# EAGLE board GBduino4 (EAGLE 7.6.0)
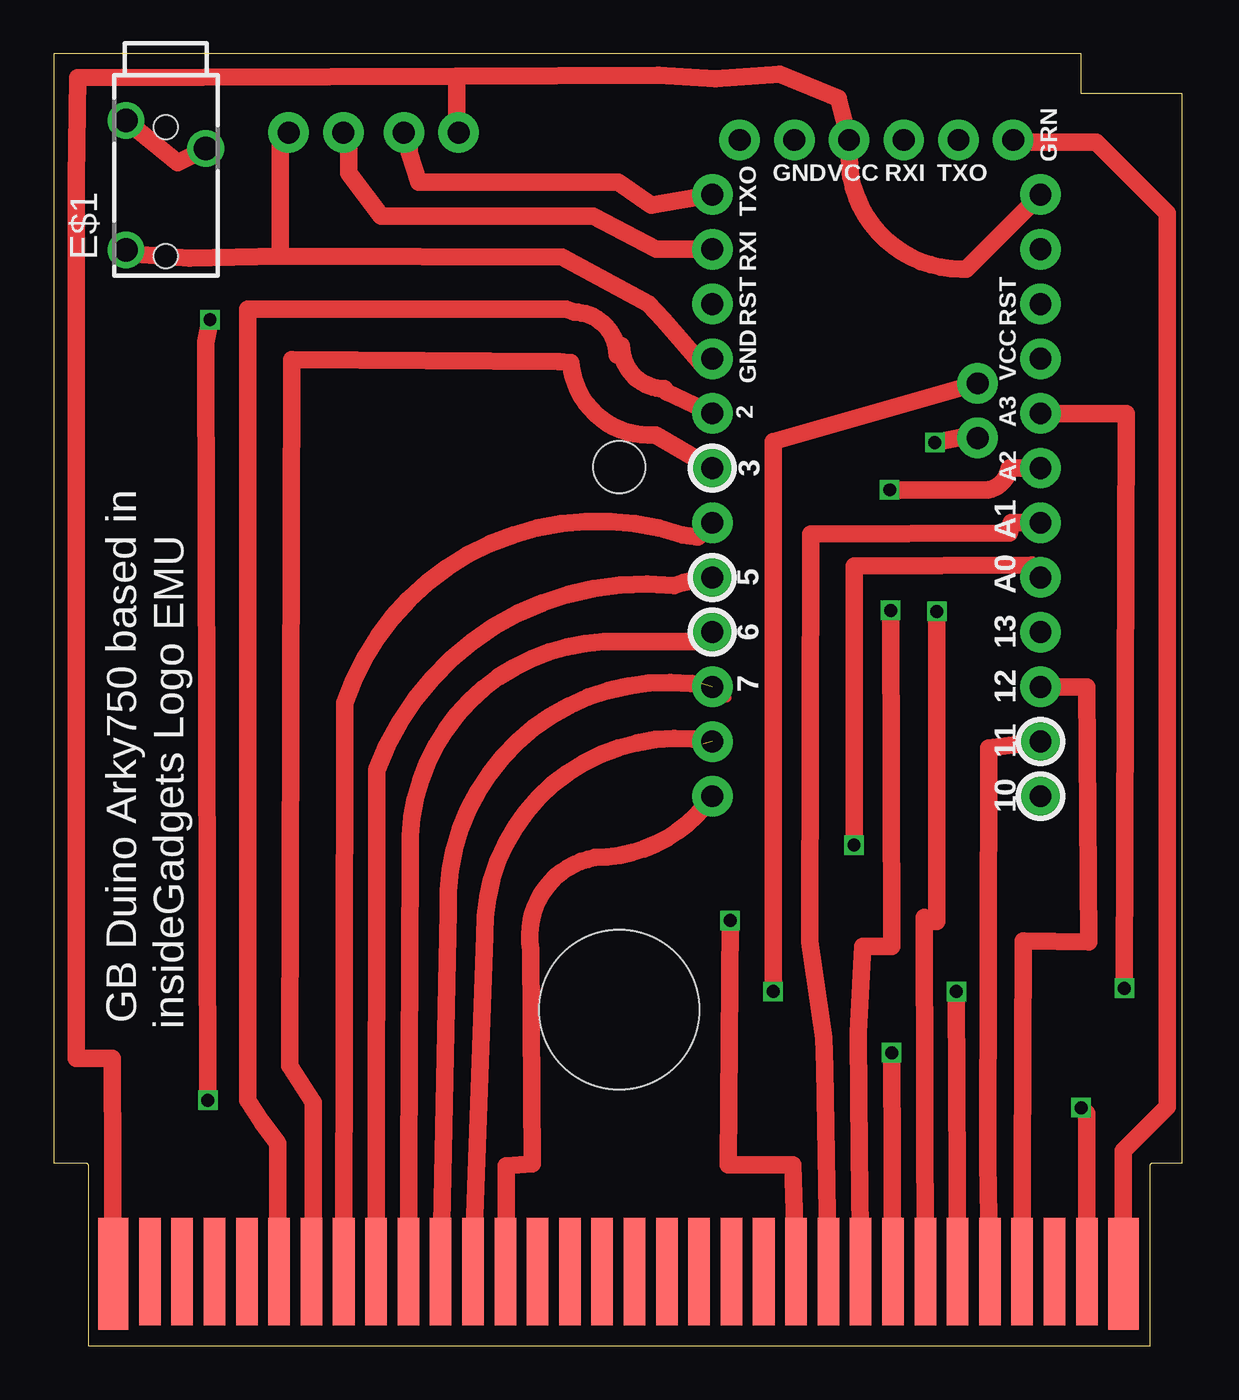
[diagram p0: board, top side]
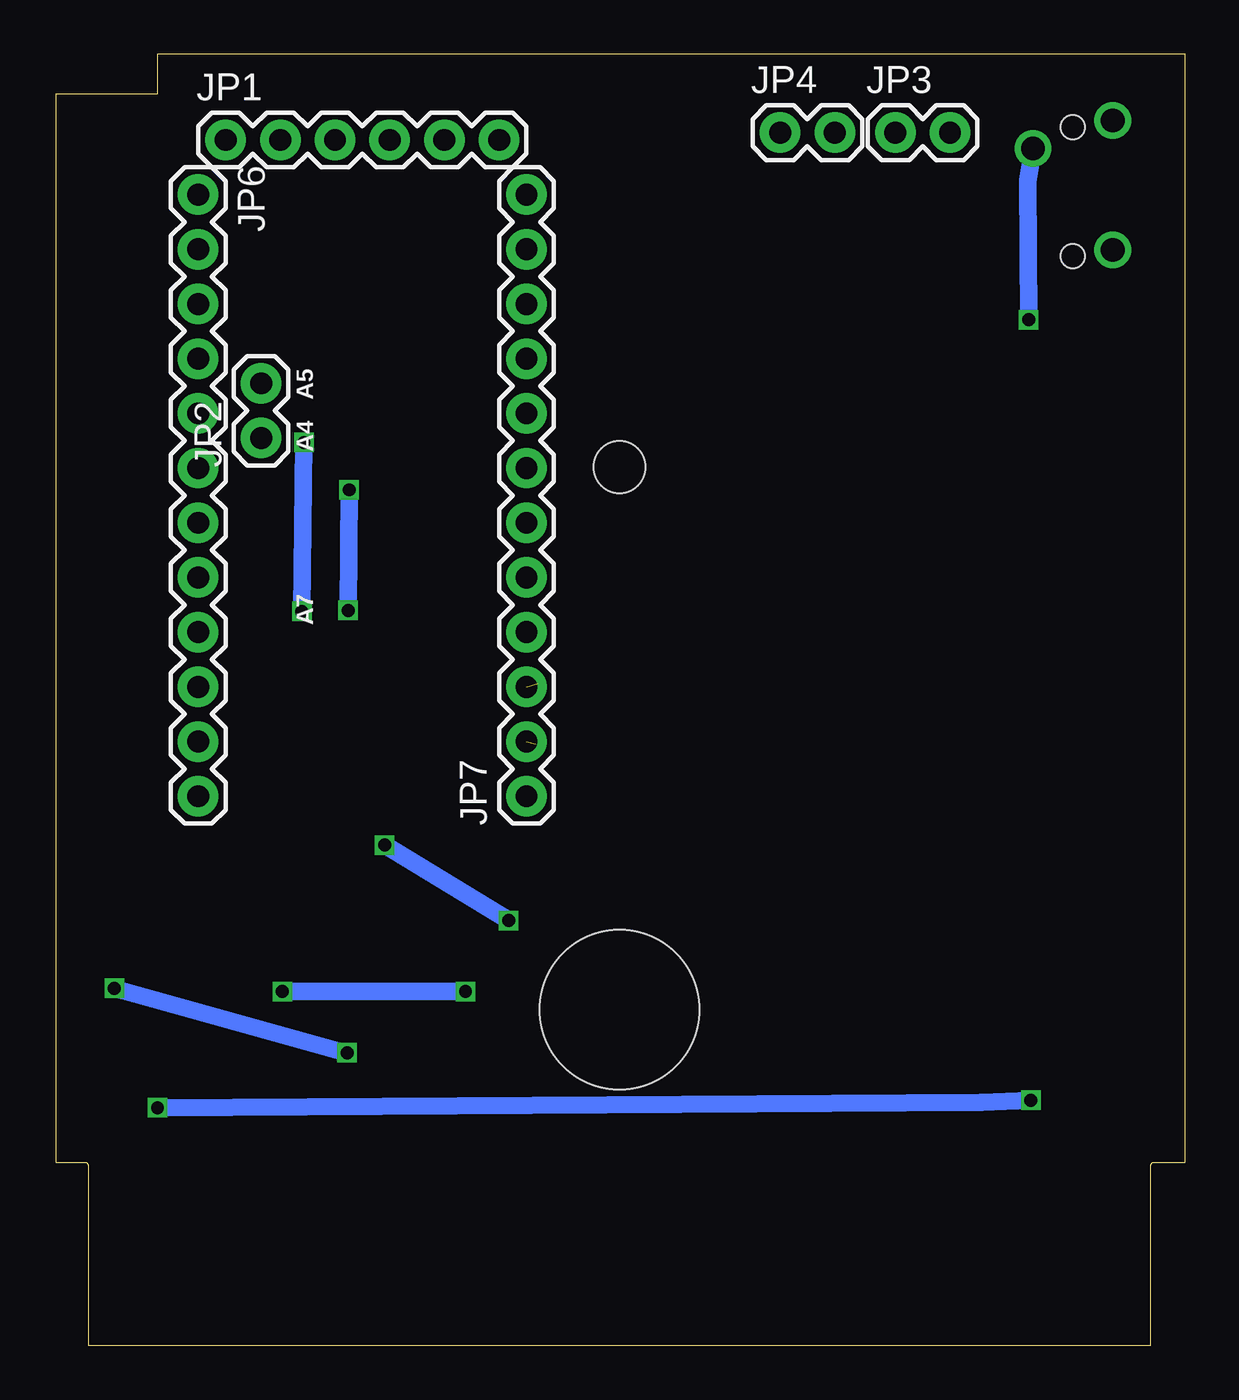
[diagram p1: board, bottom side, seen from below]

Size 52.4 x 60 mm. Coordinates in mm from the lower left corner, seen from the top.
Outline: 52.4,58.15 47.7,58.15 47.7,60 0,60 0,8.5 1.46,8.5 arc-90 1.6,8.36 1.6,0 50.9,0 50.9,8.36 arc-90 51.04,8.5 52.4,8.5 52.4,58.15
Copper layers (1*16): Top 0.035mm / dielectric 1.5mm / Bottom 0.035mm
Design rules "ITEADstudio_DRC": minimum track width 6mil, minimum drill 12mil, track to track 6mil, track to pad 6mil, pad to pad 6mil, via to via 6mil, smd to smd 0mil, copper to edge 10mil, drill to drill 10mil, minimum pad ring 10mil, minimum via ring 6mil, stop-mask expansion 2mil, vias tented up to drill 100mil, thermal gap 10mil
Net classes: 0 default: width 0.203 mm; 1 vcc: width 0.254 mm
Holes 7.4 mm at 26.25,15.6
Holes 2.4 mm at 26.25,40.8

## Footprints (pad centres in the part's own frame; a part is rotated, then mirrored left to right if it is on the bottom)
1501_03 = drill 1.1 pad 1.7: 1 -1.85,0.3; 2 1.85,-1; 3 -1.85,-5.7 | hole 1.1: 0,0; 0,-6
1X06 = drill 1.016 pad 1.88: 1 0,0; 2 2.54,0; 3 5.08,0; 4 7.62,0; 5 10.16,0; 6 12.7,0
1X02 = drill 1.016 pad 1.88: 1 0,0; 2 2.54,0
1X12 = drill 1.016 pad 1.88: 1 0,0; 2 2.54,0; 3 5.08,0; 4 7.62,0; 5 10.16,0; 6 12.7,0; 7 15.24,0; 8 17.78,0; 9 20.32,0; 10 22.86,0; 11 25.4,0; 12 27.94,0
GB_CART_PADS = smd 1.4 x 5.2: 1 -20.89,-0.56; 32 26.01,-0.56 | smd 1 x 5: 2 -19.19,-0.46; 3 -17.69,-0.46; 4 -16.19,-0.46; 5 -14.69,-0.46; 6 -13.19,-0.46; 7 -11.69,-0.46; 8 -10.19,-0.46; 9 -8.69,-0.46; 10 -7.19,-0.46; 11 -5.69,-0.46; 12 -4.19,-0.46; 13 -2.69,-0.46; 14 -1.19,-0.46; 15 0.31,-0.46; 16 1.81,-0.46; 17 3.31,-0.46; 18 4.81,-0.46; 19 6.31,-0.46; 20 7.81,-0.46; 21 9.31,-0.46; 22 10.81,-0.46; 23 12.31,-0.46; 24 13.81,-0.46; 25 15.31,-0.46; 26 16.81,-0.46; 27 18.31,-0.46; 28 19.81,-0.46; 29 21.31,-0.46; 30 22.81,-0.46; 31 24.31,-0.46

## Placement (x,y rotation side)
E$1  [1501_03]  5.2,56.6 0 top
JP1  FTDI Basic  [1X06]  44.54,56 0 bottom
JP2  [1X02]  42.89,42.16 90 bottom
JP3  [1X02]  13.44,56.34 0 bottom
JP4  [1X02]  18.79,56.34 0 bottom
JP6  [1X12]  45.81,53.46 270 bottom
JP7  [1X12]  30.57,25.52 90 bottom
U$1  GB_CARTPADS  [GB_CART_PADS]  23.65,3.9 0 top

## Library data of the parts
E$1 = con-lumberg
JP1-JP4 JP6 JP7 = SparkFun
U$1 = alex

## Nets
*MREQ/CS: U$1.5
*RD: U$1.4
*RESET/CS2: U$1.30
A0: JP7.8 U$1.6
A1: JP7.7 U$1.7
A2: JP7.6 U$1.8
A3: JP7.5 U$1.9
A7: JP7.1 U$1.13
A18: JP6.8 U$1.22
AUDIO_IN: E$1.1 E$1.2 U$1.31
CLK: U$1.2
D1: JP6.7 U$1.23
D4: JP2.1 U$1.26
D5: JP2.2 U$1.27
D6: JP6.11 U$1.28
D7: JP6.10 U$1.29
D8: JP7.2 U$1.12
D16: JP6.12
GND: JP1.1 U$1.32
RAW [vcc]: JP1.4 JP4.1 JP6.1 U$1.1
S$2: E$1.3 JP3.2 JP7.9
S$6: JP7.4 U$1.10
S$7: JP7.3 U$1.11
S$8: U$1.24
S$9: U$1.16
S$10: JP6.6
S$11: U$1.17
S$12: JP6.5
S$13: U$1.25
S$14: JP3.1 JP7.11
S$15: U$1.18
S$16: U$1.19
S$17: U$1.20
S$18: U$1.21
S$19: JP4.2 JP7.12
SCK: JP6.9

## Tracks (layer width: path | path; a pad name or v marks a point on that pad's centre or on a via)
A0
  Top 0.813: U$1.6 10.4,3.44 10.4,9.4 9.65,10.4 9,11.4 9,48.15 23.8,48.15 24.15,48 arc-90 26.15,46 26.35,46.45 arc90 28.35,44.45 28.45,44.3 JP7.8
A1
  Top 0.813: U$1.7 12.05,3.44 12.05,11.3 10.95,13 11.05,45.8 23.45,45.7 24,45.65 arc90 27.95,42.3 JP7.7
A2
  Top 0.813: U$1.8 13.5,29.3 13.5,29.85 arc-90 29.2,37.65 29.9,37.55 JP7.6
A3
  Top 0.813: U$1.9 15,26.75 arc-76 28.8,35.3 arc-15 JP7.5
A7
  Top 0.813: U$1.13 21,3.44 21,8.35 22.2,8.45 22.15,18.4 arc-90 25.12,22.67 arc55 JP7.1
A18  (via drill 0.6 pad 0.81)
  Top 0.813: U$1.22 34.3,8.4 31.3,8.4 v31.4,19.75 | v37.15,23.25 37.15,36.2 45.4,36.25 JP6.8
  Bottom 0.813: v31.4,19.75 v37.15,23.25
AUDIO_IN  (via drill 0.6)
  Top 0.813: U$1.31 47.96,10.79 v47.7,11.05 | v7.15,11.4 7.05,46.6 v7.25,47.65 | E$1.2 5.75,54.95 E$1.1
  Bottom 0.813: v47.7,11.05 9.45,11.3 v7.15,11.4 | v7.25,47.65 7.3,54.1 E$1.2
D1
  Top 0.813: U$1.23 35.8,12.9 35.75,14.3 35.1,18.75 35.15,37.7 44.35,37.75 44.45,38.22 JP6.7
D4  (via drill 0.6, 0.6 pad 0.81)
  Top 0.406: 42.4,42.25 JP2.1
  Top 0.813: v40.9,41.95 42.4,42.25 | U$1.26 40.4,19.9 40.4,19.7 41,19.7 v41,34.1
  Bottom 0.813: v41,34.1 v40.9,41.95
D5  (via drill 0.6)
  Top 0.813: U$1.27 v41.9,16.45 | v33.4,16.45 33.4,42 JP2.2
  Bottom 0.813: v33.4,16.45 v41.9,16.45
D6
  Top 0.813: U$1.28 43.35,8.5 43.4,27.75 JP6.11
D7
  Top 0.813: U$1.29 44.95,8.05 45,18.8 48.05,18.75 47.95,30.6 JP6.10
D8  (1 unrouted)
  Top 0.406: 29.9,27.85 30.15,27.95
  Top 0.813: U$1.12 20,19.05 arc-101 JP7.2
GND
  Top 0.813: U$1.32 49.66,9.06 51.7,11.1 51.7,52.6 48.4,55.9 44.64,55.9 JP1.1
RAW
  Top 0.813: U$1.1 2.7,13.35 1.05,13.35 1.05,54.2 1.1,58.9 18.7,58.96 | 18.7,58.96 28.05,59 30.7,58.85 33.7,59.05 36.42,57.95 JP1.4 36.92,55.23 arc90 42.15,50 42.35,50 JP6.1 | JP4.1 18.7,56.84 18.7,58.96
S$2
  Top 0.813: E$1.3 3.75,50.7 6.3,50.5 10.5,50.6 | 10.5,50.6 23.6,50.55 27.6,48.4 28.3,47.65 30.25,45.4 30.25,45.52 JP7.9 | JP3.2 10.5,56.74 10.5,50.6
S$6
  Top 0.813: U$1.10 16.55,22.8 arc-90 25.55,32.7 29.9,32.7 JP7.4
S$7  (1 unrouted)
  Top 0.406: 30.05,30.75 30,30.55 30.15,30.1 30.8,30 31.25,30.1
  Top 0.813: U$1.11 18.3,20.15 arc-104 JP7.3
S$8
  Top 0.813: 37.35,14.4 37.4,9.05 U$1.24
S$10  (via drill 0.6 pad 0.81)
  Top 0.813: v38.85,34.15 38.9,18.55 37.55,18.55 37.35,14.55 | v38.8,39.75 43,39.75 arc90 44.35,40.75 45.7,40.75 arc-90 45.75,40.7 JP6.6
  Bottom 0.813: v38.85,34.15 v38.8,39.75
S$12  (via drill 0.6 pad 0.81)
  Top 0.813: v49.7,16.6 49.8,43.3 JP6.5
  Bottom 0.813: 38.95,13.6 v49.7,16.6
S$13  (via drill 0.6)
  Top 0.813: U$1.25 v38.9,13.6
S$14
  Top 0.813: JP3.1 13.7,56.74 13.7,54.45 15.2,52.45 25.05,52.45 27.98,50.92 JP7.11
S$19
  Top 0.813: JP4.2 16.5,56.69 16.5,55.4 16.95,54.05 26.2,54.05 27.74,52.96 JP7.12

## Text on the board
tPlace: GRN | GND | VCC | RXI | TXO | TXO | RXI | RST | RST | GND | VCC | 2 | A3 | 3 | A2 | A1 | 5 | A0 | 6 | 13 | 7 | 12 | 11 | 10
bPlace: A5 | A4 | A7
_tsilk: GB Duino Arky750 based in | insideGadgets Logo EMU